# Altium PCB PCB1.PcbDoc
Units mm, origin at the board's own origin, x right, y up, seen from the top; angles counter-clockwise.
Board outline 104.97 x 104.25 mm, 2 copper layers (Top Layer, Bottom Layer); 21 components, 33 nets, 163 pads, 17 vias.
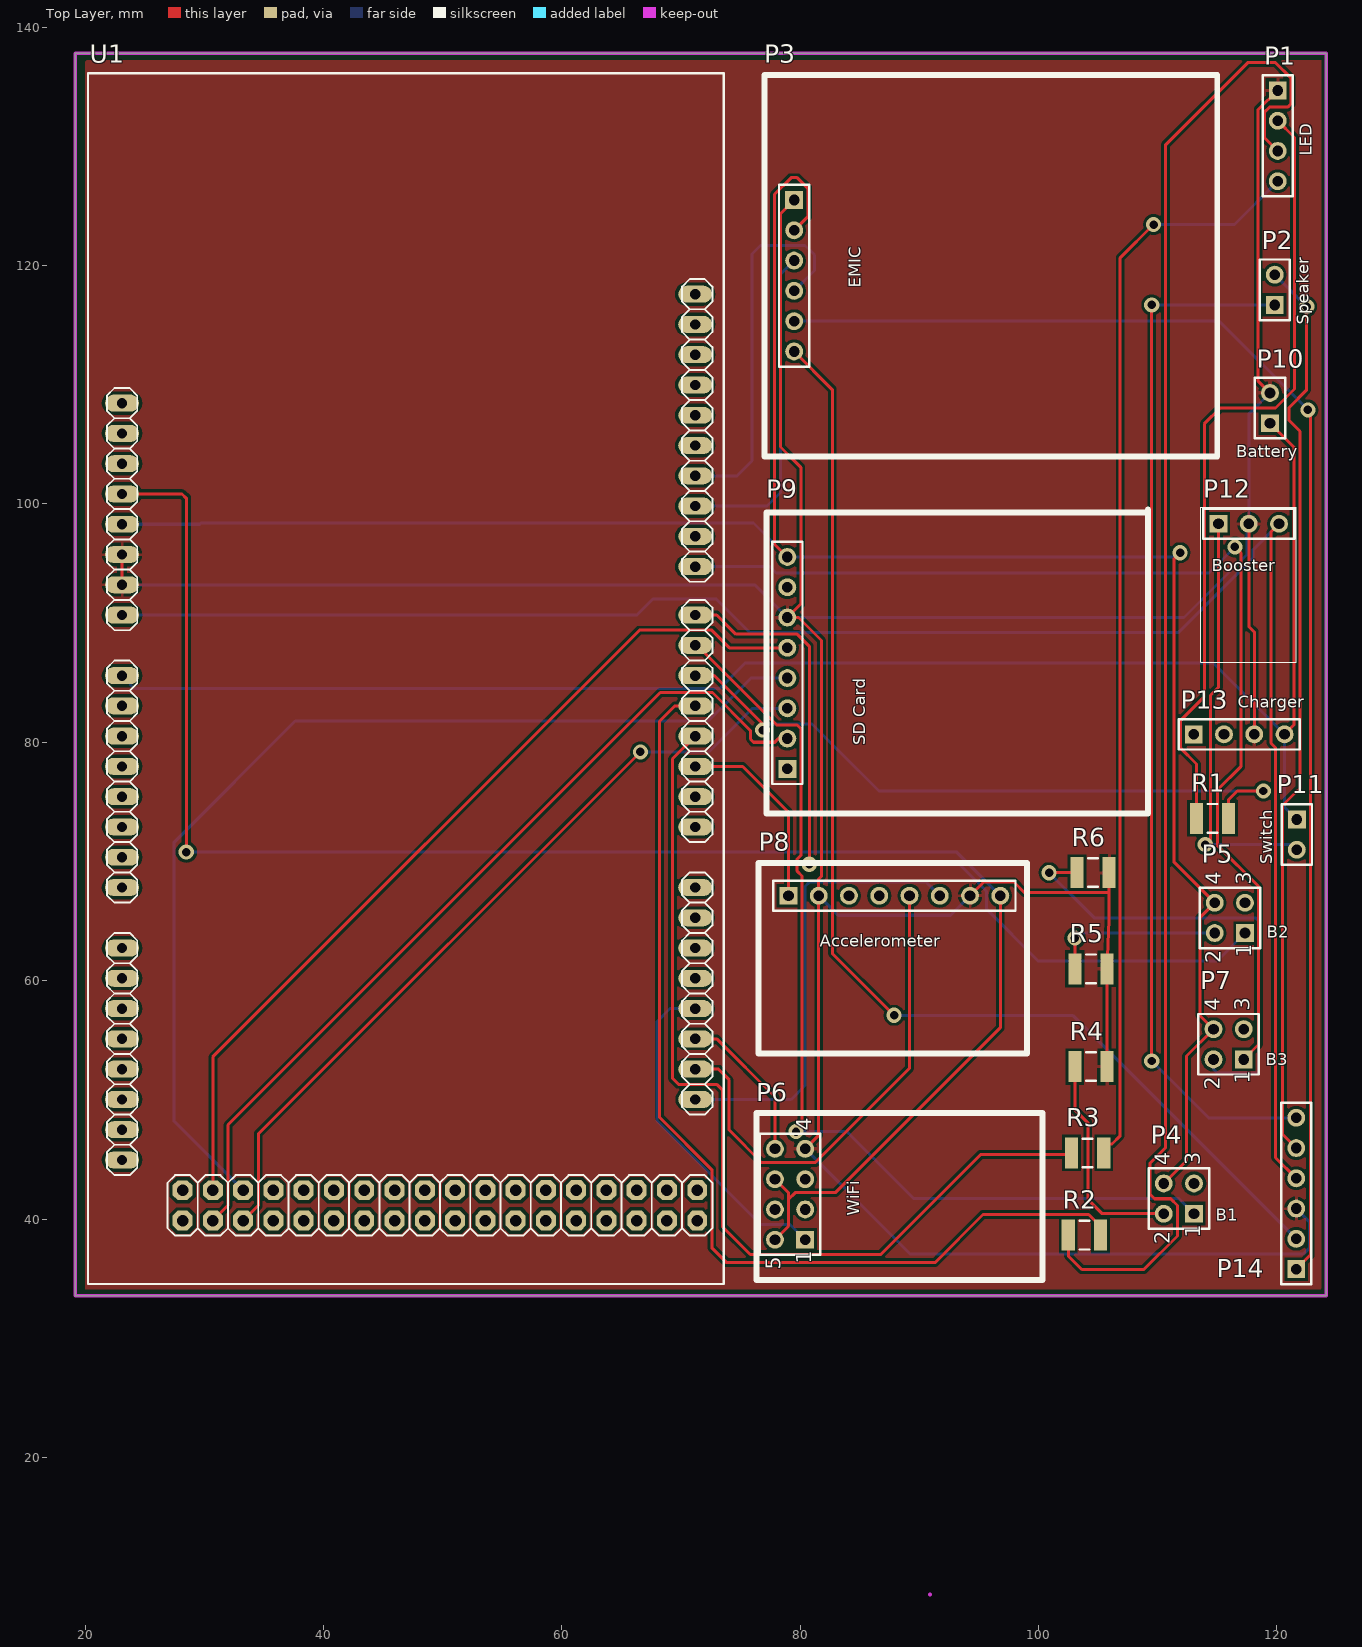
[diagram p0: Top Layer view]
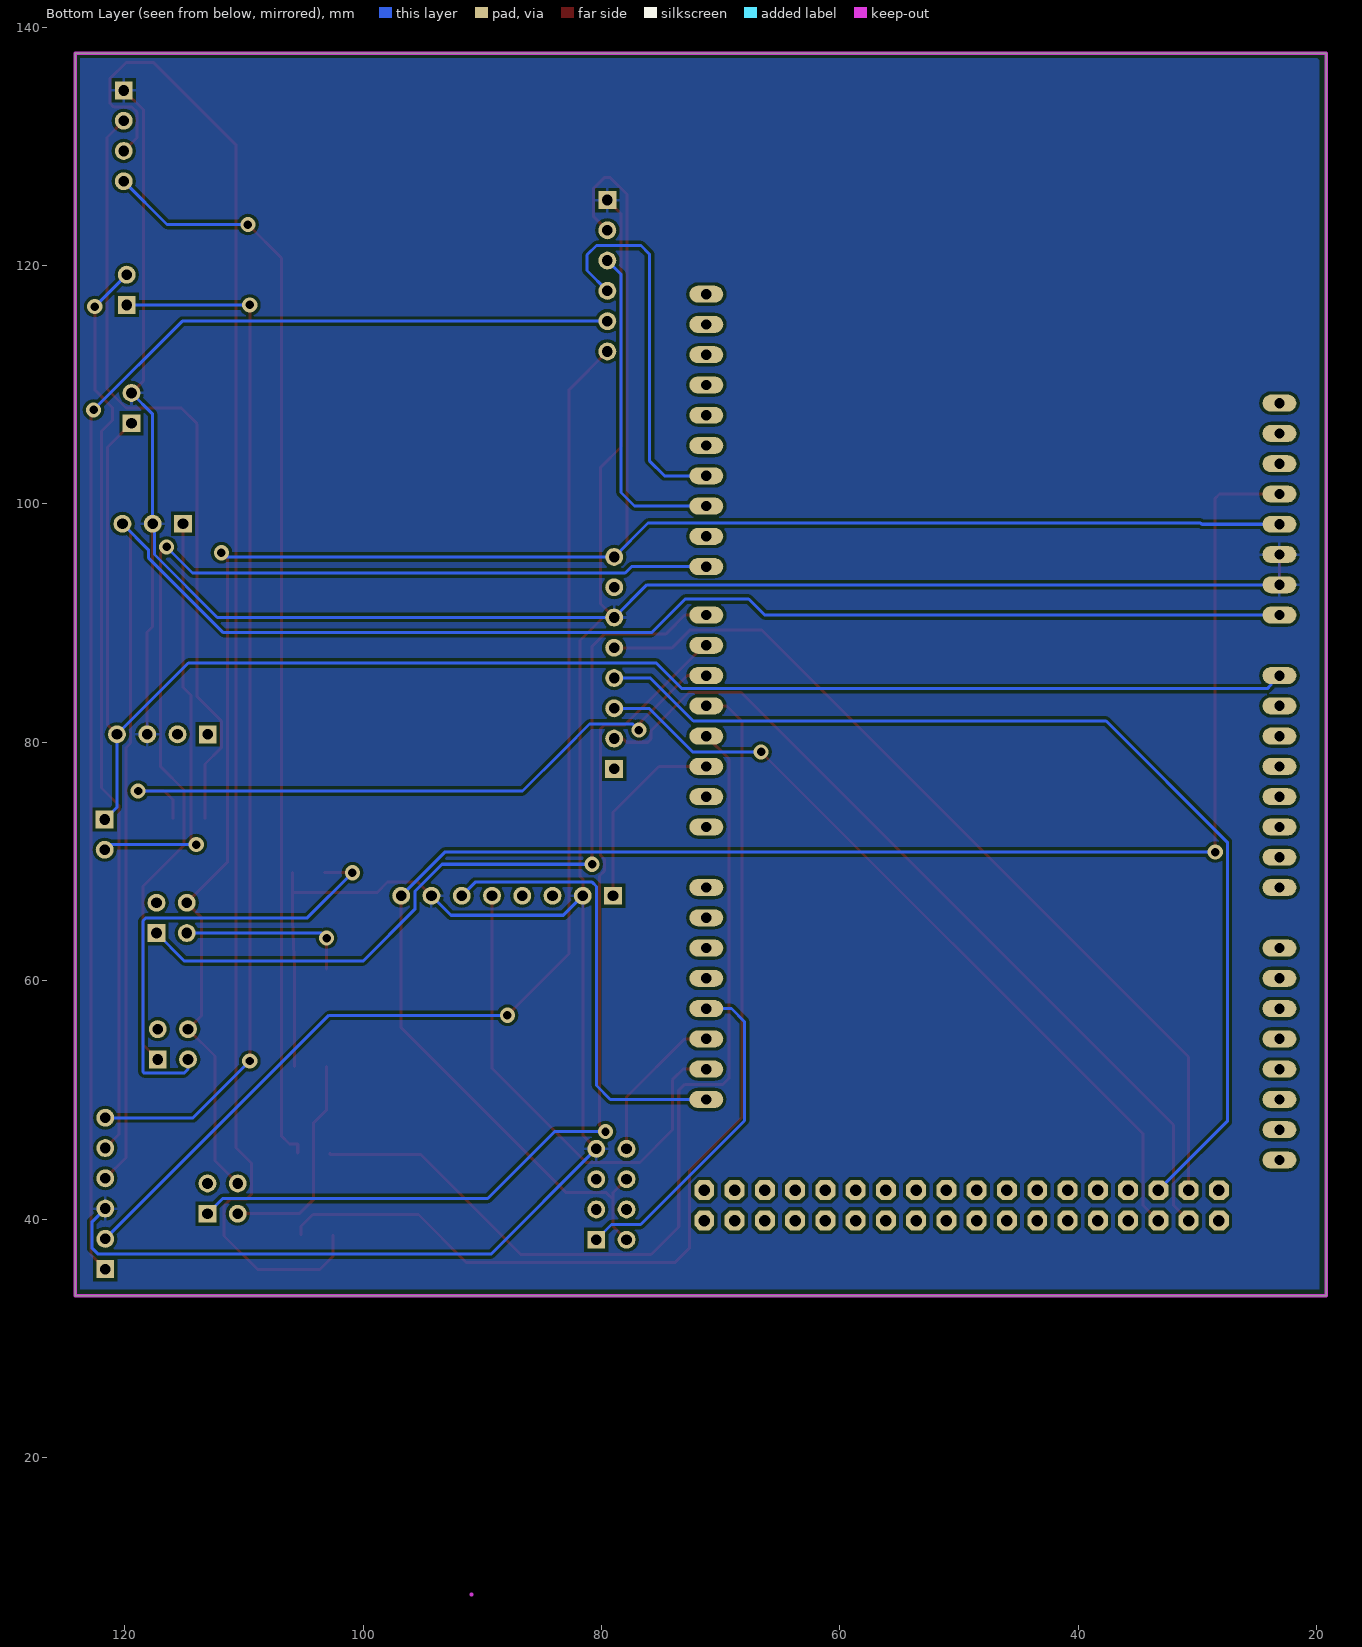
[diagram p1: Bottom Layer view, seen from below]

## Layer stack, top to bottom
Top Solder: solder mask 0.0102, Solder Resist, Dk 3.5
Top Layer: signal copper 0.0356
Dielectric 1: dielectric 0.32, FR-4, Dk 4.8
Bottom Layer: signal copper 0.0356
Bottom Solder: solder mask 0.0102, Solder Resist, Dk 3.5

## Board outline
19.175,33.575 19.175,137.825 124.15,137.825 124.15,33.575

## Design rules (kind name [scope] priority, off if disabled: settings)
Clearance [All] p1: gap=0.254
PolygonConnect [All] p1: connectstyle=Relief reliefconductorwidth=0.254 reliefentries=4 polygonreliefangle="90 Angle" airgapwidth=0.254
RoutingVias [All] p1: holewidth=0.711 width=1.27 viastyle="Through Hole" minholewidth=0.711 minwidth=1.27 maxholewidth=0.711 maxwidth=1.27
SolderMaskExpansion [All] p1: expansion=0.102
Width [All] p1: maxlimit=0.254 minlimit=0.254 preferedwidth=0.254
30 further rules are at their usual default settings.

## Classes and differential pairs
component class Sheet4: P10 P11 P12 P13
component class Sheet3: P1 P2 P3 P4 P5 P6 P7 P8 P9 P14 R1 R2 R3 R4 R5 R6 U1

## Components (designator, comment, footprint, x,y, rotation, side; value= is the part's Value field where it differs from the comment)
P1 "LEDS" HDR1X4 120.075,134.7 r270 top
P2 "Speaker" HDR1X2 119.825,116.7 r90 top
P3 "EMIC" EMIC 77.275,136.25 r0 top
P4 "B1" HDR2X2 113.05,40.45 r90 top
P5 "B2" HDR2X2 117.325,64 r90 top
P6 "WiFi" WiFi 76.525,35.6 r90 top
P7 "B3" HDR2X2 117.225,53.4 r90 top
P8 "Accelerometer" Acceelrometer 76.375,70.075 r0 top
P9 "SD Card" "SD Card" 76.925,74.05 r90 top
P10 "Battery pin" HDR1X2 119.425,106.775 r90 top
P11 "Switch" HDR1X2 121.675,73.525 r270 top
P12 "Voltage Booster" "Voltage Regulator" 121.625,86.725 r180 top
P13 "Charger" HDR1X4 113.025,80.675 r0 top
P14 "Amplifier" HDR1X6 121.625,35.8 r90 top
R1 "Res1" 14-1210 114.6,73.625 r180 top
R2 "Res1" 14-1210 103.85,38.65 r180 top
R3 "Res1" 14-1210 104.125,45.55 r0 top
R4 "Res1" 14-1210 104.4,52.8 r0 top
R5 "Res1" 14-1210 104.4,61 r0 top
R6 "Res1" 14-1210 104.575,69.075 r0 top
U1 "Mega" Mega 73.6,136.15 r270 top

## Footprints (in the part's own frame and the unit in brackets; to place one, negate y for a bottom-side part, rotate by r counter-clockwise, add the part's x,y. Pads: shape width x height; smd on the part's side, far side on the other; paste and mask are expansions set on the pad)
14-1210 [mm] "Chip Resistor, Body 3.2x2.5mm, IPC High Density"
  rect 1.1x2.6 smd: 1(-1.35,0) 2(1.35,0)
  silkscreen extent -0.4,-1.2 0.4,1.2, body extent -1.68,-1.32 1.68,1.32, height 0.9
Acceelrometer [mm]
  rect 1.5x1.5 hole 0.9: 1(2.644,-2.942)
  round 1.5 hole 0.9: 2(5.184,-2.942) 3(7.724,-2.942) 4(10.264,-2.942) 5(12.804,-2.942) 6(15.344,-2.942) 7(17.884,-2.942) 8(20.424,-2.942)
  silkscreen extent 0.14,-16.19 22.64,-0.19
EMIC [mm]
  rect 1.5x1.5 hole 0.9: 1(2.223,-10.749)
  round 1.5 hole 0.9: 2(2.223,-13.289) 3(2.223,-15.829) 4(2.223,-18.369) 5(2.223,-20.909) 6(2.223,-23.449)
  silkscreen extent -0.28,-32.25 37.72,-0.25
HDR1X2 [mm] "Connector; Header; 2 Position"
  rect 1.5x1.5 hole 0.9: 1(0,0)
  round 1.5 hole 0.9: 2(2.54,0)
  silkscreen extent -1.27,-1.27 3.81,1.27
HDR1X4 [mm] "Connector; Header; 4 Position"
  rect 1.5x1.5 hole 0.9: 1(0,0)
  round 1.5 hole 0.9: 2(2.54,0) 3(5.08,0) 4(7.62,0)
  silkscreen extent -1.27,-1.27 8.89,1.27
HDR1X6 [mm] "Connector; Header; 6 Position"
  rect 1.5x1.5 hole 0.9: 1(0,0)
  round 1.5 hole 0.9: 2(2.54,0) 3(5.08,0) 4(7.62,0) 5(10.16,0) 6(12.7,0)
  silkscreen extent -1.27,-1.27 13.97,1.27
HDR2X2 [mm] "Connector; Header; 2x2 Position"
  rect 1.5x1.5 hole 0.9: 1(0,0)
  round 1.5 hole 0.9: 2(0,2.54) 3(2.54,0) 4(2.54,2.54)
  silkscreen extent -1.27,-1.27 3.81,3.81
Mega [mil]
  oval 56x112 hole 34: 0(2490.12,-94.66) 1(2390.12,-94.68) 2(2290.12,-94.7) 3(2190.12,-94.72) 4(2090.12,-94.73) 5(1990.12,-94.75) 6(1890.12,-94.77) 7(1790.12,-94.78) 8(1630.12,-94.72) 9(1530.12,-94.72) 10(1430.12,-94.72) 11(1330.12,-94.72) 12(1230.12,-94.72) 13(1130.12,-94.72) 14(2690.12,-94.78) 15(2790.12,-94.77) 16(2890.12,-94.75) 17(2990.12,-94.73) 18(3090.12,-94.72) 19(3190.12,-94.7) 20(3290.12,-94.68) 21(3390.12,-94.66) 54(1990.12,-1987.83) 55(2090.12,-1987.83) 56(2190.12,-1987.83) 57(2290.12,-1987.83) 58(2390.12,-1987.83) 59(2490.12,-1987.83) 60(2590.12,-1987.83) 61(2690.12,-1987.83) 62(2890.12,-1987.83) 63(2990.12,-1987.83) 64(3090.12,-1987.83) 65(3190.12,-1987.83) 66(3290.12,-1987.83) 67(3390.12,-1987.83) 68(3490.12,-1987.83) 69(3590.12,-1987.83) 74(1090.12,-1987.83) 75(1190.12,-1987.83) 76(1290.12,-1987.83) 77(1390.12,-1987.83) 78(1490.12,-1987.83) 79(1590.12,-1987.83) 80(1690.12,-1987.83) 81(1790.12,-1987.83) 82(730.12,-94.72) 82(830.12,-94.72) 83(930.12,-94.72) 84(1030.12,-94.72)
  oct 66x66 hole 38: 22(3690.09,-187.84) 23(3790.09,-187.83) 24(3690.1,-287.84) 25(3790.1,-287.83) 26(3690.1,-387.84) 27(3790.1,-387.83) 28(3690.1,-487.84) 29(3790.1,-487.83) 30(3690.11,-587.84) 31(3790.11,-587.83) 32(3690.11,-687.84) 33(3790.11,-687.83) 34(3690.11,-787.84) 35(3790.11,-787.83) 36(3690.12,-887.84) 37(3790.12,-887.83) 38(3690.12,-987.84) 39(3790.12,-987.83) 40(3690.12,-1087.84) 41(3790.12,-1087.83) 42(3690.13,-1187.84) 43(3790.13,-1187.83) 44(3690.13,-1287.84) 45(3790.13,-1287.83) 46(3690.13,-1387.84) 47(3790.13,-1387.83) 48(3690.14,-1487.84) 49(3790.14,-1487.83) 50(3690.14,-1587.84) 51(3790.14,-1587.83) 52(3690.14,-1687.84) 53(3790.14,-1687.83) 70(3690.09,-87.84) 71(3790.09,-87.83) 72(3690.15,-1787.84) 73(3790.15,-1787.83)
  silkscreen extent 0,-2100 4000,0
"SD Card" [mm]
  rect 1.5x1.5 hole 0.9: 1(3.726,-2.003)
  round 1.5 hole 0.9: 2(6.266,-2.003) 3(8.806,-2.003) 4(11.346,-2.003) 5(13.886,-2.003) 6(16.426,-2.003) 7(18.966,-2.003) 8(21.506,-2.003)
  silkscreen extent -0.02,-32.25 25.48,-0.25
"Voltage Regulator" [mm]
  rect 1.5x1.5 hole 0.9: 1(6.521,-11.615)
  round 1.5 hole 0.9: 2(3.981,-11.615) 3(1.441,-11.615)
  silkscreen extent 0,-13 8,0
WiFi [mm]
  rect 1.5x1.5 hole 0.9: 1(2.671,-3.9)
  round 1.5 hole 0.9: 2(5.211,-3.9) 3(7.751,-3.9) 4(10.291,-3.9) 5(2.671,-1.36) 6(5.211,-1.36) 7(7.751,-1.36) 8(10.291,-1.36)
  silkscreen extent -0.7,-23.8 13.3,0.2

## Part data
P1 P13: library part "Header 4", "Header, 4-Pin"
P2 P10 P11: library part "Header 2", "Header, 2-Pin"
P3 P14: library part "Header 6", "Header, 6-Pin"
P4 P5 P7: library part "Header 2X2", "Header, 2-Pin, Dual row"
P6: library part "Header 4X2A", "Header, 4-Pin, Dual row"
P8 P9: library part "Header 8", "Header, 8-Pin"
P12: library part "Header 3", "Header, 3-Pin"
R1 R2 R3 R4 R5 R6: "Resistor"
U1: "MEGA"

## Via types
v1: diameter 1.27, hole 0.711, Top Layer to Bottom Layer, 17 vias

## Nets (pads, with @x,y where several pads share a name; then routed paths per layer and width w, separated by ;. In a path a pad name is that pad's centre, name@x,y a point inside that pad or via, vN(x,y) a via of type N, cw(c..) or ccw(c..) an arc to the next point about the centre after c; other vN are vias at no path point)
B: R1.1 U1.5 | length 57.2
  Top Layer w0.254: U1.5 72.788,85.601 76.855,81.534 v1(76.855,81.026) ; R1.1 115.95,75.184 116.686,75.92 v1(118.872,75.92)
  Bottom Layer w0.254: v1(76.855,81.026) 77.363,81.534 81.001,81.534 83.185,79.35 86.615,75.92 v1(118.872,75.92)
B1: P4.1 U1.6 | length 82.3
  Top Layer w0.254: U1.6 71.346,88.141 78.029,81.458 79.756,81.458 80.059,81.155 80.059,70.509 79.756,70.206 79.756,69.19 80.162,68.783 80.162,47.854 v1(79.654,47.346)
  Bottom Layer w0.254: v1(79.654,47.346) 83.922,47.346 89.535,41.732 111.768,41.732 P4.1
B2: P5.1 U1.7 | length 70.7
  Top Layer w0.254: U1.7 73,90.681 74.603,89.078 79.756,89.078 80.772,88.062 v1(80.772,69.774)
  Bottom Layer w0.254: v1(80.772,69.774) 93.37,69.774 95.656,67.488 95.656,65.989 100,61.646 114.971,61.646 P5.1
B3: P7.1 U1.8 | length 92.4
  Top Layer w0.254: v1(116.484,96.393) 116.974,95.903 116.974,77.96 115.011,75.997 115.011,71.374 118.466,67.92 118.466,54.641 P7.1
  Bottom Layer w0.254: U1.8 77.467,94.745 78.003,94.209 113.284,94.209 114.3,94.209 v1(116.484,96.393)
CLK: P9.5 U1.52 | length 74.8
  Top Layer w0.254: U1.52 30.729,53.614 66.523,89.408 72.593,89.408 74.065,87.936 P9.5
CS: P9.2 U1.53 | length 72.8
  Top Layer w0.254: U1.53 32.004,41.155 32.004,47.904 68.275,84.176 72.644,84.176 75.839,80.98 75.839,80.264 76.093,80.01 77.871,80.01 78.177,80.316 P9.2
DI: P9.3 U1.51 | length 67
  Top Layer w0.254: U1.51 34.537,41.148 34.537,47.135 v1(66.599,79.197)
  Bottom Layer w0.254: v1(66.599,79.197) 72.339,79.197 75.998,82.856 P9.3
DO: P9.4 U1.50 | length 88.8
  Bottom Layer w0.254: U1.50 27.483,48.207 27.483,71.628 37.643,81.788 72.288,81.788 75.896,85.396 P9.4
G: R2.1 U1.4 | length 85.5
  Top Layer w0.254: U1.4 69.497,83.061 68.199,81.763 68.199,48.539 72.593,44.145 72.593,37.592 73.838,36.347 91.313,36.347 95.352,40.386 104.209,40.386 105.2,39.395 R2.1
GND: P1.1 P3.1 P6.4 P8.2 P8.7 P9.6 P10.2 P12.2 P13.3 P14.3 R4.2 R5.2 R6.2 U1.79 U1.80 | length 335.3
  Top Layer w0.254: U1.80 U1.79 ; P3.1 78.359,124.362 78.359,104.775 80.061,103.073 80.061,91.609 P9.6 79.865,90.476 81.788,88.553 81.788,68.758 81.559,68.529 P8.2 81.559,47.025 P6.4 ; P8.7 95.401,68.275 97.942,68.275 98.831,67.386 105.925,67.386 ; R4.2 R5.2 105.925,65.123 105.925,67.386 ; R6.2 105.925,67.386 ; P12.2 117.644,89.717 118.105,89.256 P13.3 ; P10.2 118.436,110.304 118.436,133.096 119.238,133.898 119.273,133.898 P1.1
  Bottom Layer w0.254: U1.80 76.183,93.221 P9.6 111.82,90.476 112.218,90.476 117.5,95.758 117.5,98.196 P12.2 117.644,107.534 P10.2 ; P6.4 89.257,37.059 122.225,37.059 122.758,37.592 122.758,39.747 P14.3 ; P8.2 83.198,65.494 92.62,65.494 P8.7
INT: P8.1 U1.2 | length 16.4
  Top Layer w0.254: U1.2 75.184,77.981 79.019,74.146 P8.1
NetP1_2: P1.2 R1.2 | length 66.4
  Top Layer w0.254: R1.2 113.25,78.188 111.894,79.544 111.894,81.806 113.919,83.831 113.919,106.731 115.24,108.052 119.888,108.052 121.488,109.652 121.488,130.747 P1.2
NetP1_3: P1.3 R2.2 | length 128.7
  Top Layer w0.254: R2.2 102.5,36.895 103.632,35.763 108.839,35.763 111.658,38.583 111.658,41.148 111.1,41.707 109.728,41.707 109.372,42.062 109.372,44.704 110.668,45.999 110.668,130.15 117.551,137.033 119.888,137.033 121.209,135.712 121.209,133.604 120.904,133.299 119.38,133.299 118.944,132.863 118.944,130.751 P1.3
NetP1_4: P1.4 R3.2 | length 92
  Top Layer w0.254: R3.2 105.475,46.304 106.172,46.304 106.858,46.99 106.858,120.65 v1(109.652,123.444)
  Bottom Layer w0.254: v1(109.652,123.444) 116.439,123.444 P1.4
NetP4_2: P4.2 R4.1 | length 18.5
  Top Layer w0.254: R4.1 103.05,49.174 104.14,48.084 104.14,41.656 105.346,40.45 P4.2
NetP5_2: P5.2 R5.1 | length 14.5
  Top Layer w0.254: R5.1 v1(103.05,63.576)
  Bottom Layer w0.254: v1(103.05,63.576) 103.474,64 P5.2
NetP7_2: P7.2 R6.1 | length 39.1
  Top Layer w0.254: v1(100.889,69.063) 103.225,69.063 R6.1
  Bottom Layer w0.254: v1(100.889,69.063) 104.673,65.278 118.212,65.278 118.466,65.024 118.466,57.683 118.466,52.349 118.364,52.248 115.837,52.248 115.015,52.248 114.685,52.578 P7.2
R: R3.1 U1.3 | length 79.4
  Top Layer w0.254: U1.3 69.291,78.618 69.291,51.816 69.799,51.308 73,51.308 73.508,50.8 73.508,39.345 75.819,37.033 86.766,37.033 95.148,45.415 102.775,45.415 R3.1
RX: P6.1 U1.18 | length 28.5
  Bottom Layer w0.254: U1.18 69.088,57.661 67.996,56.569 67.996,48.26 76.708,39.548 79.148,39.548 P6.1
S+: P2.2 P14.5 | length 76.5
  Top Layer w0.254: P14.5 120.472,47.113 120.472,74.701 121.945,76.175 121.945,106.096 121.031,107.01 121.031,108.102 122.504,109.576 v1(122.504,116.561)
  Bottom Layer w0.254: P2.2 v1(122.504,116.561)
S-: P2.1 P14.6 | length 87.9
  Top Layer w0.254: v1(109.499,53.264) v1(109.499,116.7)
  Bottom Layer w0.254: v1(109.499,53.264) 114.263,48.5 P14.6 ; v1(109.499,116.7) P2.1
SCL: P8.6 U1.21 | length 38.3
  Bottom Layer w0.254: U1.21 79.248,50.041 80.416,51.209 80.416,67.908 80.772,68.264 90.588,68.264 P8.6
SDA: P8.5 U1.20 | length 41.4
  Top Layer w0.254: U1.20 73.152,52.581 74.046,51.687 74.046,47.468 76.759,44.755 81.28,44.755 89.179,52.654 P8.5
SIN: P3.4 U1.11 | length 32.2
  Bottom Layer w0.254: U1.11 74.704,102.365 75.971,103.632 75.971,120.98 76.683,121.691 80.416,121.691 81.204,120.904 81.204,119.587 P3.4
SOUT: P3.3 U1.10 | length 27.6
  Bottom Layer w0.254: U1.10 77.216,99.825 78.359,100.968 78.359,119.282 P3.3
SP+: P3.6 P14.2 | length 100.7
  Top Layer w0.254: P3.6 82.702,109.597 82.702,62.281 v1(87.884,57.099)
  Bottom Layer w0.254: v1(87.884,57.099) 102.866,57.099 P14.2
SP-: P3.5 P14.1 | length 118.9
  Top Layer w0.254: P14.1 122.809,36.984 122.809,107.696 v1(122.606,107.899)
  Bottom Layer w0.254: P3.5 115.164,115.341 v1(122.606,107.899)
TX: P6.8 U1.19 | length 13.1
  Top Layer w0.254: U1.19 73,55.121 77.885,50.236 P6.8
VBAT: P10.1 P11.1 P13.4 U1.54 | length 136.7
  Top Layer w0.254: P10.1 121.437,104.763 121.437,81.467 P13.4
  Bottom Layer w0.254: U1.54 23.825,85.601 23.825,84.811 24.13,84.506 73.228,84.506 75.387,86.665 114.655,86.665 P13.4 120.645,74.555 P11.1
VCC-3.3: P6.5 P6.7 P8.8 U1.77 | length 145.9
  Top Layer w0.254: U1.77 28.143,100.841 28.499,100.485 v1(28.499,70.79) ; P6.5 79.019,39.405 79.019,41.656 ; P6.7 79.019,42.217 79.019,41.656 ; P8.8 96.799,56.057 82.958,42.217 79.58,42.217 79.019,41.656
  Bottom Layer w0.254: v1(28.499,70.79) 93.142,70.79 P8.8
VCC-5: P3.2 P4.4 P5.4 P7.4 P9.8 U1.78 | length 186
  Top Layer w0.254: P9.8 77.851,96.633 77.851,125.984 79.248,127.381 79.756,127.381 80.645,126.492 80.645,124.108 P3.2 ; P4.4 112.42,44.9 112.42,53.675 P7.4 113.538,57.087 113.538,65.293 P5.4 111.386,69.939 111.386,95.409 v1(111.887,95.91)
  Bottom Layer w0.254: U1.78 29.619,98.301 29.718,98.4 76.084,98.4 P9.8 111.533,95.556 v1(111.887,95.91)
VIN: P12.3 P14.4 U1.81 | length 159.1
  Top Layer w0.254: P12.3 119.507,97.663 119.507,79.934 119.888,79.553 119.888,45.157 P14.4
  Bottom Layer w0.254: U1.81 66.297,90.681 67.64,92.024 72.974,92.024 75.794,89.205 111.721,89.205 117.175,94.659 118.008,95.492 118.008,96.164 P12.3
VSWITCH: P11.2 P12.1 | length 35.2
  Top Layer w0.254: v1(113.995,71.425) 114.427,71.857 114.427,83.947 115.104,84.624 P12.1
  Bottom Layer w0.254: v1(113.995,71.425) 121.235,71.425 P11.2
pads on no net: P4.3 P5.3 P6.2 P6.3 P6.6 P7.3 P8.3 P8.4 P9.1 P9.7 P13.1 P13.2 U1.0 U1.1 U1.9 U1.12 U1.13 U1.14 U1.15 U1.16 U1.17 U1.22 U1.23 U1.24 U1.25 U1.26 U1.27 U1.28 U1.29 U1.30 U1.31 U1.32 U1.33 U1.34 U1.35 U1.36 U1.37 U1.38 U1.39 U1.40 U1.41 U1.42 U1.43 U1.44 U1.45 U1.46 U1.47 U1.48 U1.49 U1.55 U1.56 U1.57 U1.58 U1.59 U1.60 U1.61 U1.62 U1.63 U1.64 U1.65 U1.66 U1.67 U1.68 U1.69 U1.70 U1.71 U1.72 U1.73 U1.74 U1.75 U1.76 U1.82 U1.83 U1.84

## Polygon pours and split planes (outlines as drawn)
GND on Top Layer "Top Layer-No Net" (solid, pour order 12): 20,137.1 20.125,137.225 123.725,137.225 123.725,34.25 123.85,34.125 20,34.125 20,136.975 19.875,137.1
GND on Bottom Layer "Top Layer-No Net" (solid, pour order 14): 19.75,137.225 20.125,137.6 123.975,137.6 123.975,34 124.1,33.875 123.85,34.125 19.75,34.125 19.75,137.225 20,137.475

## Keep-outs
Keep-Out Layer:
  lines w0.3: 90.9,8.5 90.925,8.475 ; 19.175,33.575 19.175,137.825 124.15,137.825 124.15,33.575 19.175,33.575

## Silkscreen, mask and mechanical layers (free items; w line width, h text height)
Top Overlay:
  text "LED" at 122.925,129.2 h1 r90
  text "EMIC" at 85.1,118.15 h1 r90
  text "Speaker" at 122.675,115.025 h1 r90
  text "Battery" at 116.6,103.925 h1
  text "Booster" at 114.525,94.35 h1
  text "Charger" at 116.725,82.9 h1
  text "SD Card" at 85.45,79.75 h1 r90
  text "Switch" at 119.6,69.775 h1 r90
  text "B2" at 119.15,63.6 h1
  text "Accelerometer" at 81.65,62.85 h1
  text "B3" at 119.05,52.9 h1
  text "WiFi" at 84.95,40.3 h1 r90
  text "B1" at 114.875,39.875 h1
Mechanical 1:
  the board outline again, w1.2

## Text inside footprints (layer, text, board x,y; h text height)
P4: Top Overlay "1" at 113.558,38.418 h1.27 r90; Top Overlay "2" at 111.018,37.91 h1.27 r90; Top Overlay "4" at 111.018,44.514 h1.27 r90; Top Overlay "3" at 113.558,44.514 h1.27 r90
P5: Top Overlay "1" at 117.833,61.968 h1.27 r90; Top Overlay "2" at 115.293,61.46 h1.27 r90; Top Overlay "4" at 115.293,68.064 h1.27 r90; Top Overlay "3" at 117.833,68.064 h1.27 r90
P6: Top Overlay "5" at 78.393,35.731 h1.27 r90; Top Overlay "1" at 80.933,36.239 h1.27 r90; Top Overlay "4" at 80.933,47.415 h1.27 r90
P7: Top Overlay "1" at 117.733,51.368 h1.27 r90; Top Overlay "2" at 115.193,50.86 h1.27 r90; Top Overlay "4" at 115.193,57.464 h1.27 r90; Top Overlay "3" at 117.733,57.464 h1.27 r90